# EAGLE board PCB (EAGLE 9.7.0)
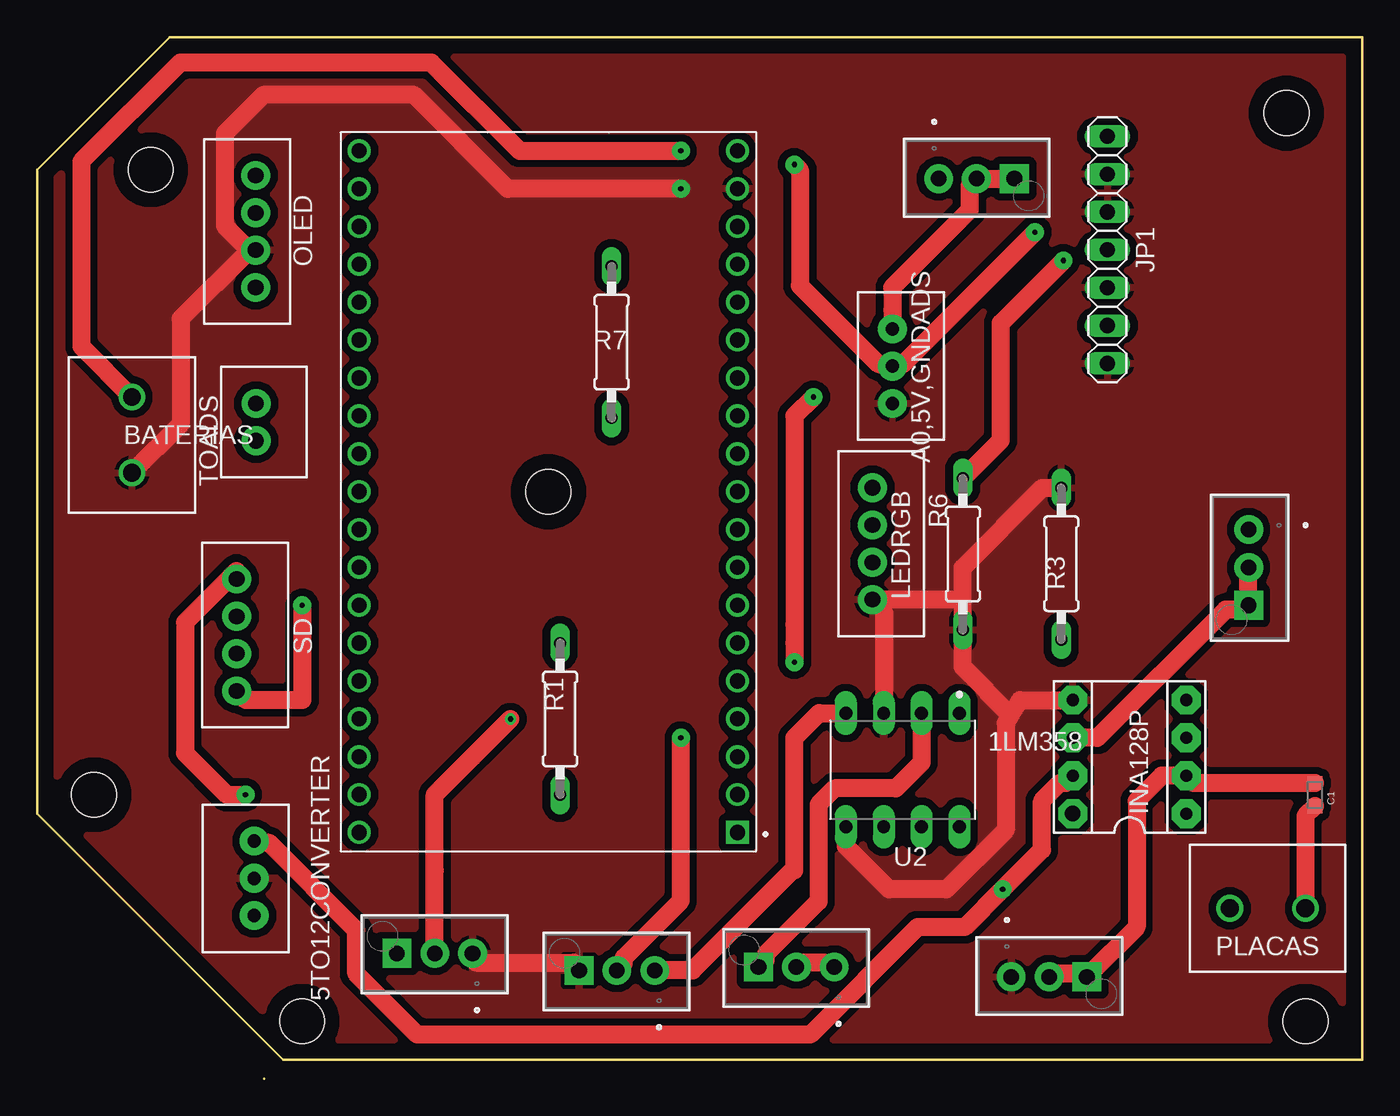
[diagram p0: board, top side]
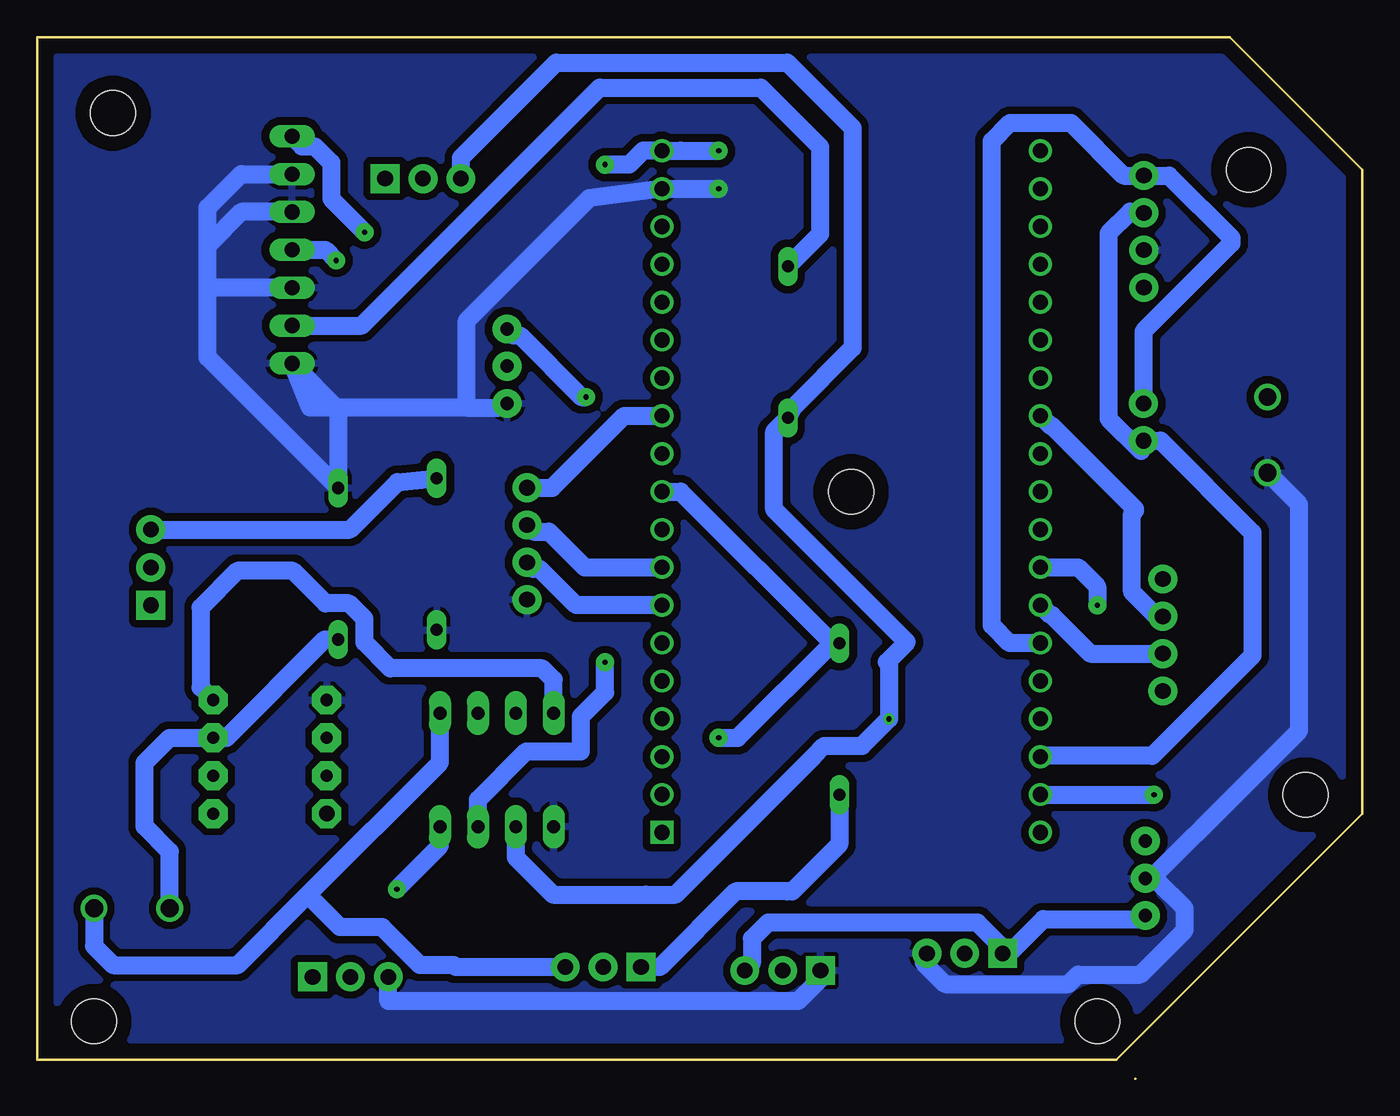
[diagram p1: board, bottom side, seen from below]

Size 88.9 x 69.85 mm. Coordinates in mm from the lower left corner, seen from the top.
Outline: 15.21,0 15.24,0
Outline: 88.9,1.27 16.51,1.27 0,17.78 0,60.96 8.89,69.85 88.9,69.85 88.9,1.27
Copper layers (1*16): Top / Bottom
Stack-up Default Layer Stack: Top SilkScreen Epoxy Ink / Top SolderMask SR:Green 0.0254mm Dk 4.3 / Top Surface Finish Lead-Free 0.02mm / Top CuFoil:007 0.035mm / Dielectric-1 User Defined 1.5mm / Bottom CuFoil:007 0.035mm / Bottom Surface Finish Lead-Free 0.02mm / Bottom SolderMask SR:Green 0.0254mm Dk 4.3 / Bottom SilkScreen Epoxy Ink
Design rules: minimum copper width all 0.63mm, minimum copper width 1.2mm, minimum drill size 0.5mm, copper clearance wire_polygon to wire_polygon 0.26mm, copper clearance wire_polygon to pad_smd 0.5mm, copper clearance wire_polygon to via 0.5mm, copper clearance pad_smd to pad_smd 0.5mm, copper clearance pad_smd to via 0.5mm, copper clearance via to via 0.5mm, copper clearance smd to pad (same net) 0.5mm, copper clearance smd to via (same net) 0.5mm, copper clearance smd to smd (same net) 0.5mm, dimension clearance 40mil, via restrict clearance 0mil, restrict clearance 0mil, drill distance 6mil, keepout clearance 0mil
Holes 3 mm at 83.82,64.77 17.78,3.86 85.09,3.86 34.29,39.37 7.62,60.96 3.81,19.05

## Footprints (pad centres in the part's own frame; a part is rotated, then mirrored left to right if it is on the bottom)
DIP762W56P254L930H431Q8B = drill 0.866 pad 1.466 long: 1 -3.81,3.81; 2 -3.81,1.27; 3 -3.81,-1.27; 4 -3.81,-3.81; 5 3.81,-3.81; 6 3.81,-1.27; 7 3.81,1.27; 8 3.81,3.81
B3B-XH-A = drill 0.9 pad 1.93: 1 0,0; 2 2.5,0; 3 5,0
POT_3296W = drill 1.05 pad 1.93 square: 1 0,0 | drill 1.05 pad 1.93: 2 2.54,0; 3 5.08,0
TERMBLK_508-2N = drill 1.2: 1 0,0; 2 5.08,0
CAPC1608X87N = smd 0.92 x 0.97: 1 -0.775,0; 2 0.775,0
DIL08 = drill 0.813 pad 1.93 octagon: 1 -3.81,-3.81; 2 -1.27,-3.81; 3 1.27,-3.81; 4 3.81,-3.81; 5 3.81,3.81; 6 1.27,3.81; 7 -1.27,3.81 | drill 1.05 pad 1.93 octagon: 8 -3.81,3.81
1X07 = drill 1.016 long: 1 -7.62,0; 2 -5.08,0; 3 -2.54,0; 4 0,0; 5 2.54,0; 6 5.08,0; 7 7.62,0
B4B-XH-A = drill 1.05 pad 1.93: 1 0,0; 2 2.5,0; 3 5,0; 4 7.5,0
0207/10 = drill 0.813 long: 1 -5.08,0; 2 5.08,0
B2B-XH-A = drill 1.05 pad 1.93: 1 0,0; 2 2.5,0
MODULE_ESP32-DEVKITC-32U = drill 1.02 square: 1 -12.7,22.85 | drill 1.02: 2 -12.7,20.31; 3 -12.7,17.77; 4 -12.7,15.23; 5 -12.7,12.69; 6 -12.7,10.15; 7 -12.7,7.61; 8 -12.7,5.07; 9 -12.7,2.53; 10 -12.7,-0.01; 11 -12.7,-2.55; 12 -12.7,-5.09; 13 -12.7,-7.63; 14 -12.7,-10.17; 15 -12.7,-12.71; 16 -12.7,-15.25; 17 -12.7,-17.79; 18 -12.7,-20.33; 19 -12.7,-22.87; 20 12.7,-22.87; 21 12.7,-20.33; 22 12.7,-17.79; 23 12.7,-15.25; 24 12.7,-12.71; 25 12.7,-10.17; 26 12.7,-7.63; 27 12.7,-5.09; 28 12.7,-2.55; 29 12.7,-0.01; 30 12.7,2.53; 31 12.7,5.07; 32 12.7,7.61; 33 12.7,10.15; 34 12.7,12.69; 35 12.7,15.23; 36 12.7,17.77; 37 12.7,20.31; 38 12.7,22.85

## Placement (x,y rotation side)
1LM358  AS358AP-E1-_PDIP  [DIP762W56P254L930H431Q8B]  58.06,20.71 270 top
5TO12CONVERTER  B3B-XH-A  [B3B-XH-A]  14.55,10.94 90 top
A0,5V,GNDADS  B3B-XH-A  [B3B-XH-A]  57.38,50.29 270 top
AMPLITUD  100K  [POT_3296W]  48.39,7.49 0 top
AMPLITUD1  10k  [POT_3296W]  65.56,60.37 180 top
BATERIAS  2828XX-2282837-2  [TERMBLK_508-2N]  6.35,40.64 90 top
C1  MC0603B105K160CT  [CAPC1608X87N]  85.73,19.05 270 top
INA128P  INA128P  [DIL08]  73.29,21.59 90 top
JP1  PINHD-1X7  [1X07]  71.81,55.59 270 top
LEDRGB  B4B-XH-A  [B4B-XH-A]  56.04,39.63 270 top
OFFSET  1K  [POT_3296W]  36.35,7.26 0 top
OFFSET1  1K  [POT_3296W]  24.13,8.41 0 top
OFFSET2  1K  [POT_3296W]  81.28,31.75 90 top
OLED  B4B-XH-A  [B4B-XH-A]  14.66,53.07 90 top
PLACAS  2828XX-2282837-2  [TERMBLK_508-2N]  85.09,11.43 180 top
R1  10k  [0207/10]  35.08,24.13 270 top
R3  100  [0207/10]  68.71,34.54 270 top
R6  100  [0207/10]  62.1,35.19 270 top
R7  10k  [0207/10]  38.54,49.4 90 top
SD  B4B-XH-A  [B4B-XH-A]  13.38,33.51 270 top
TOADS  B2B-XH-A  [B2B-XH-A]  14.68,42.79 90 top
TRIMPLACAS  10K  [POT_3296W]  70.43,6.83 180 top
U2  ESP32-DEVKITC-32U  [MODULE_ESP32-DEVKITC-32U]  34.29,39.37 180 top

## Library data of the parts
1LM358 = IC_Linear; CATEGORY: Linear ICs; DATASHEET: https://www.diodes.com/assets/Datasheets/AS358-358A-358B.pdf; DESCRIPTION: General Purpose Operational Amplifiers 2 Circuit 36V 0.5 mA 2 mV 20 nA 8-PDIP; MANUFACTURER: Diodes Incorporated; MPN: AS358AP-E1; OPERATING_TEMPERATURE: -40°C ~ 85°C; PACKAGE_SIZE: 8-PDIP; PACKAGE_TYPE: Through Hole; PART_STATUS: Active; ROHS: Compliant; SERIES: AS358; SUBCATEGORY: Amplifiers; TYPE: General Purpose
5TO12CONVERTER A0,5V,GNDADS = Connector2; CATEGORY: Connectors; DATASHEET: https://www.jst-mfg.com/product/pdf/eng/eXH.pdf; DESCRIPTION: Connector Header Through Hole 3 position 0.098" (2.50mm); MANUFACTURER: JST Sales America Inc.; MPN: B3B-XH-A; OPERATING_TEMPERATURE: -25°C ~ 85°C; PACKAGE_SIZE: NA; PACKAGE_TYPE: Through Hole; PART_STATUS: Active; PITCH: 0.098" (2.50mm); ROHS: Compliant; SERIES: XH; SUBCATEGORY: Rectangular Connectors; TYPE: Male Headers
AMPLITUD AMPLITUD1 OFFSET OFFSET1 OFFSET2 TRIMPLACAS = Trimm1; COPYRIGHT: Copyright (C) 2025 Ultra Librarian. All rights reserved.; MANUFACTURER_NAME: Bourns Electronics; MANUFACTURER_PART_NUMBER: 3296W-1-201LF
BATERIAS PLACAS = Connector; CATEGORY: Connectors; DATASHEET: https://www.te.com/usa-en/product-282837-2.datasheet.pdf; DESCRIPTION: 2 Position Wire to Board Terminal Block Horizontal with Board 0.200" (5.08mm) Through Hole; MANUFACTURER: TE Connectivity AMP Connectors; MPN: 282837-2; OPERATING_TEMPERATURE: -40°C ~ 105°C; PACKAGE_SIZE: NA; PACKAGE_TYPE: Through Hole; PART_STATUS: Active; PITCH: 0.200" (5.08mm); ROHS: Compliant; SERIES: Buchanan; SUBCATEGORY: Terminal Blocks; TYPE: Screw Terminal - Rising Cage Clamp Side Wire Entry
C1 = MC0603B105K160CT; AVAILABILITY: Not in stock; CHECK_PRICES: https://www.snapeda.com/parts/MC0603B105K160CT/Multicomp/view-part/?ref=eda; DESCRIPTION: Cap, Mlcc, X7r, 1uf, 16v, 0603; MF: Multicomp; MP: MC0603B105K160CT; PACKAGE: 0603 Multicomp; PRICE: None; SNAPEDA_LINK: https://www.snapeda.com/parts/MC0603B105K160CT/Multicomp/view-part/?ref=snap
INA128P = burr-brown2; MANUFACTURER: TEXAS INSTRUMENTS; MPN: INA128P
JP1 = Connector; CATEGORY: Connectors; DESCRIPTION: Header-Straight-7 Position; PACKAGE_TYPE: Through Hole; PITCH: 0.100" (2.54mm); SUBCATEGORY: Headers; TYPE: Male Pins
LEDRGB OLED SD = Connector2; CATEGORY: Connectors; DATASHEET: https://www.jst-mfg.com/product/pdf/eng/eXH.pdf; DESCRIPTION: Connector Header Through Hole 4 position 0.098" (2.50mm); MANUFACTURER: JST Sales America Inc.; MPN: B4B-XH-A; OPERATING_TEMPERATURE: -25°C ~ 85°C; PACKAGE_SIZE: NA; PACKAGE_TYPE: Through Hole; PART_STATUS: Active; PITCH: 0.098" (2.50mm); ROHS: Compliant; SERIES: XH; SUBCATEGORY: Rectangular Connectors; TYPE: Male Headers
R1 R3 R6 R7 = rclopia; SPICEPREFIX: R
TOADS = Connector2; CATEGORY: Connectors; DATASHEET: https://www.jst-mfg.com/product/pdf/eng/eXH.pdf; DESCRIPTION: Connector Header Through Hole 2 position 0.098" (2.50mm); MANUFACTURER: JST Sales America Inc.; MPN: B2B-XH-A; OPERATING_TEMPERATURE: -25°C ~ 85°C; PACKAGE_SIZE: NA; PACKAGE_TYPE: Through Hole; PART_STATUS: Active; PITCH: 0.098" (2.50mm); ROHS: Compliant; SERIES: XH; SUBCATEGORY: Rectangular Connectors; TYPE: Male Headers
U2 = ESP32-DEVKITC-32U; MANUFACTURER: Espressif Systems; MAXIMUM_PACKAGE_HEIGHT: N/A; PARTREV: V4; STANDARD: Manufacturer Recommendations

## Nets
3V3_2: U2.1
+5V: A0,5V,GNDADS.2 BATERIAS.2 JP1.1 U2.19
D13: U2.14
GND: 1LM358.3 1LM358.5 5TO12CONVERTER.2 A0,5V,GNDADS.3 BATERIAS.1 INA128P.5 JP1.2 JP1.3 JP1.5 JP1.7 LEDRGB.4 OFFSET1.3 OFFSET.1 OLED.2 R3.1 R6.2 TRIMPLACAS.3 U2.18
GND2: U2.38
N$1: LEDRGB.3 U2.7
N$2: INA128P.6 OFFSET2.1 OFFSET2.2
N$3: INA128P.3 PLACAS.2 R3.2
N$4: C1.1 INA128P.2 TRIMPLACAS.1 TRIMPLACAS.2
N$5: LEDRGB.2 U2.8
N$7: 1LM358.2 AMPLITUD.1 R1.2
N$8: JP1.6 R7.2
N$10: JP1.4 OFFSET2.3 R6.1
N$12: SD.2 U2.27
N$13: U2.20
N$14: SD.1 U2.37
N$15: 1LM358.6 AMPLITUD1.3 OFFSET1.2 R7.1
N$16: 1LM358.7 A0,5V,GNDADS.1 AMPLITUD1.1 AMPLITUD1.2
N$17: OFFSET.2 R1.1 U2.10
N$18: LEDRGB.1 U2.12
N$21: SD.4 U2.31
N$24: SD.3 U2.32
N$28: 1LM358.1 AMPLITUD.2 AMPLITUD.3 C1.2 PLACAS.1
N$30: OLED.4 TOADS.2 U2.33
N$34: OLED.3 TOADS.1 U2.36
N$35: OLED.1
V+: 1LM358.8 5TO12CONVERTER.3 INA128P.7
V-: 1LM358.4 5TO12CONVERTER.1 INA128P.4 OFFSET1.1 OFFSET.3

## Tracks (layer width: path | path; a pad name or v marks a point on that pad's centre or on a via)
+5V  (via drill 0.35 pad 1.2)
  Top 1.2: BATERIAS.2 2.96,49.11 2.96,61.53 9.59,68.16 26.44,68.16 32.36,62.23 40.64,62.23 v43.18,62.23 | v50.8,61.31 51.15,60.96 51.17,60.96 51.17,53.2 56.44,47.93 57.17,47.93 A0,5V,GNDADS.2 57.9,47.93 58.09,47.93 v66.94,56.78
  Bottom 1.2: v50.8,61.31 49.18,61.31 48.25,62.24 U2.19 45.71,62.24 v43.19,62.24 v43.18,62.23 | JP1.1 71.13,62.54 70.27,62.54 69.18,61.45 69.18,59.02 v66.94,56.78
GND  (via drill 0.35 pad 1.2)
  Top 1.2: R6.2 62.1,32.13 LEDRGB.4 56.79,31.38 1LM358.3 | R6.2 62.1,34.29 67.44,39.62 R3.1 | OFFSET.1 36,7.78 29.43,7.78 OFFSET1.3 | OLED.2 14.83,55.23 | OLED.2 14.23,55.57 9.62,50.96 9.62,43.91 BATERIAS.1 | OLED.2 14.28,55.57 13.97,55.88 13.93,55.88 12.59,57.22 12.59,63.39 15.19,65.99 25.27,65.99 31.57,59.69 v43.18,59.69 | 1LM358.5 54.25,15.6 57.15,12.7 61,12.7 64.98,16.68 64.98,23.85 65.3,24.37 | INA128P.5 69.85,25.4 65.93,25.4 65.3,24.37 | 65.3,24.37 63.71,25.96 63.71,26.01 62.1,27.61 R6.2
  Bottom 1.2: 60.09,45.01 70.6,45.01 JP1.7 68.71,44.88 R3.1 77.47,48.38 77.47,52.07 77.47,53.05 | 60.09,45.01 57.9,45.01 A0,5V,GNDADS.3 | 60.09,45.01 60.09,50.85 51.88,59.06 U2.18 v43.18,59.69 | 13.73,13.25 11.91,11.43 11.91,9.97 14.9,6.98 19.07,6.98 19.71,6.34 27.99,6.34 29.43,7.78 OFFSET1.3 | 13.73,13.25 14.1,13.62 5TO12CONVERTER.2 | OFFSET.1 36,7.05 37.85,5.2 65.35,5.2 TRIMPLACAS.3 | BATERIAS.1 4.23,38.52 4.23,23.34 8.67,18.89 13.73,13.83 13.73,13.25 | JP1.2 75.22,60.67 77.47,58.42 77.47,55.88 | 77.47,53.05 77.47,55.88 | JP1.3 75.22,58.13 77.47,55.88 | JP1.5 77.47,53.05
  pour Bottom (isolate 0.5): 88.9,69.85 88.9,1.27 16.51,1.27 0,17.78 0,60.96 8.89,69.85
  pour Top (isolate 0.5): 88.9,69.85 88.9,1.27 16.51,1.27 0,17.78 0,60.96 8.89,69.85
N$1
  Bottom 1.2: LEDRGB.3 55.6,34.2 55.18,34.2 52.75,31.76 U2.7
N$2
  Top 1.2: OFFSET2.2 81.26,34.06 81.26,31.87 OFFSET2.1 80.99,31.46 79.73,31.46 71.13,22.86 INA128P.6
N$3
  Bottom 1.2: PLACAS.2 80.01,15.23 81.7,16.93 81.7,21.17 80.02,22.86 INA128P.3 76.21,22.86 69.61,29.46 R3.2
N$4
  Top 1.2: TRIMPLACAS.2 68.12,7.05 70.31,7.05 TRIMPLACAS.1 73.76,10.17 73.76,18.63 75.45,20.32 INA128P.2 77.59,19.82 C1.1
N$5
  Bottom 1.2: LEDRGB.2 55.6,36.7 54.56,36.7 52.17,34.3 U2.8
N$7
  Top 1.2: AMPLITUD.1 48.87,7.96 48.87,8.34 52.42,11.89 52.42,18.39 53.49,19.47 57.6,19.47 59.33,21.2 1LM358.2
  Bottom 1.2: AMPLITUD.1 47.12,7.49 42.04,12.57 38.57,12.57 38.23,12.57 38.1,12.7 35.08,15.72 R1.2
N$8
  Bottom 1.2: R7.2 36.38,56.64 36.38,62.5 40.35,66.47 51.16,66.47 67.12,50.51 JP1.6
N$10  (via drill 0.35 pad 1.2)
  Top 1.2: R6.1 64.64,42.81 64.64,50.67 v68.85,54.88
  Bottom 1.2: R6.1 64.74,40.01 67.92,36.83 OFFSET2.3 | JP1.4 69.56,55.59 v68.85,54.88
N$12
  Bottom 1.2: SD.2 13.8,31.01 15.44,32.66 15.44,37.9 15.24,38.1 15.24,38.21 20.82,43.78 20.91,43.78 U2.27
N$14  (via drill 0.35 pad 1.2)
  Top 1.2: v13.97,19.05 12.7,19.05 9.91,21.84 9.91,30.6 13.37,34.06 SD.1
  Bottom 1.2: U2.37 v13.98,19.06 v13.97,19.05
N$15  (via drill 0.35)
  Top 1.2: OFFSET1.2 26.67,13.97 26.67,19.05 29.21,21.59 v31.75,24.13
  Bottom 1.2: AMPLITUD1.3 60.48,61.76 54.08,68.16 38.58,68.16 34.19,63.77 34.19,49.01 38.19,45.01 R7.1 39.46,43.4 39.46,38.19 30.55,29.29 31.9,27.94 31.75,27.94 v31.75,24.13 33.56,22.32 36.1,22.32 36.83,21.59 46.07,12.35 48.07,12.35 54.3,12.35 56.79,14.85 1LM358.6
N$16  (via drill 0.35 pad 1.2)
  Top 1.2: AMPLITUD1.1 65.2,60.34 63.74,60.34 AMPLITUD1.2 62.54,59.89 62.54,58.24 57.38,53.08 57.38,51.56 A0,5V,GNDADS.1 | v52.07,45.72 50.8,44.45 50.8,30.48 50.8,29.21 v50.8,27.94
  Bottom 1.2: 1LM358.7 59.33,18.72 56.1,21.95 52.42,21.95 52.42,24.3 50.8,25.92 v50.8,27.94 | A0,5V,GNDADS.1 56.94,49.85 56.52,49.85 52.39,45.72 v52.07,45.72
N$17  (via drill 0.35 pad 1.2)
  Top 1.2: 38.97,7.35 OFFSET.2 39.36,7.74 39.36,8.12 43.18,11.94 43.18,20.32 43.18,21.16 v43.18,22.86
  Bottom 1.2: U2.10 45.73,39.38 35.56,29.21 | 35.56,29.21 R1.1 | v43.18,22.86 41.91,22.86 35.56,29.21
N$18
  Bottom 1.2: U2.12 49.53,44.45 54.35,39.63 LEDRGB.1
N$21  (via drill 0.35 pad 1.2)
  Top 1.2: v17.78,31.75 17.78,25.4 13.99,25.4 SD.4
  Bottom 1.2: U2.31 19.05,34.29 17.78,33.02 v17.78,31.75
N$24
  Bottom 1.2: U2.32 20.91,31.09 20.82,31.09 18.24,28.51 SD.3
N$28
  Top 1.2: AMPLITUD.2 51.33,7.78 52.79,7.78 AMPLITUD.3 | C1.2 85.09,17.63 PLACAS.1
  Bottom 1.2: 53.52,7.78 AMPLITUD.3 60.83,7.49 60.96,7.62 63.21,7.62 64.49,8.9 65.75,10.16 68.58,10.16 70.11,11.69 70.74,12.32 | PLACAS.1 85.09,8.89 83.82,7.62 75.45,7.62 70.74,12.32 | 70.74,12.32 61.87,21.19 1LM358.1
N$30
  Bottom 1.2: U2.33 23.67,29.22 24.86,30.41 24.86,62.88 23.63,64.1 19.55,64.1 16.01,60.57 OLED.4 12.96,60.57 8.78,56.39 8.78,56.03 14.68,50.13 TOADS.2
N$34
  Bottom 1.2: U2.36 21.4,21.65 14.1,21.65 7.37,28.38 7.37,36.63 13.53,42.79 TOADS.1 14.83,42.09 17.02,44.28 17.02,56.69 15.56,58.15 14.83,58.15 OLED.3
V+  (via drill 0.35 pad 1.2)
  Top 1.2: 5TO12CONVERTER.3 14.83,15.81 15.56,15.81 21.4,9.97 21.4,7.05 25.49,2.96 51.87,2.96 59.07,10.16 62.23,10.16 v64.77,12.7 67.41,15.34 67.41,18.63 68.62,19.84 69,19.84 INA128P.7
  Bottom 1.2: 1LM358.8 61.87,15.63 64.79,12.72 v64.77,12.7
V-
  Top 1.2: OFFSET.3 43.97,7.26 50.67,13.97 50.8,13.97 50.8,22.86 52.46,24.52 1LM358.4
  Bottom 1.2: 5TO12CONVERTER.1 14.83,10.7 21.4,10.7 23.59,8.51 OFFSET1.1 24.13,8.79 25.81,10.47 39.87,10.47 40.95,9.39 40.95,7.74 OFFSET.3 | 1LM358.4 54.25,26.76 55.02,27.53 65.21,27.53 66.95,29.26 66.95,30.85 67.98,31.88 69.57,31.88 71.75,34.06 75.48,34.06 77.94,31.6 77.94,26.25 INA128P.4